# EAGLE board H Bridge and Accessories (EAGLE 6.2)
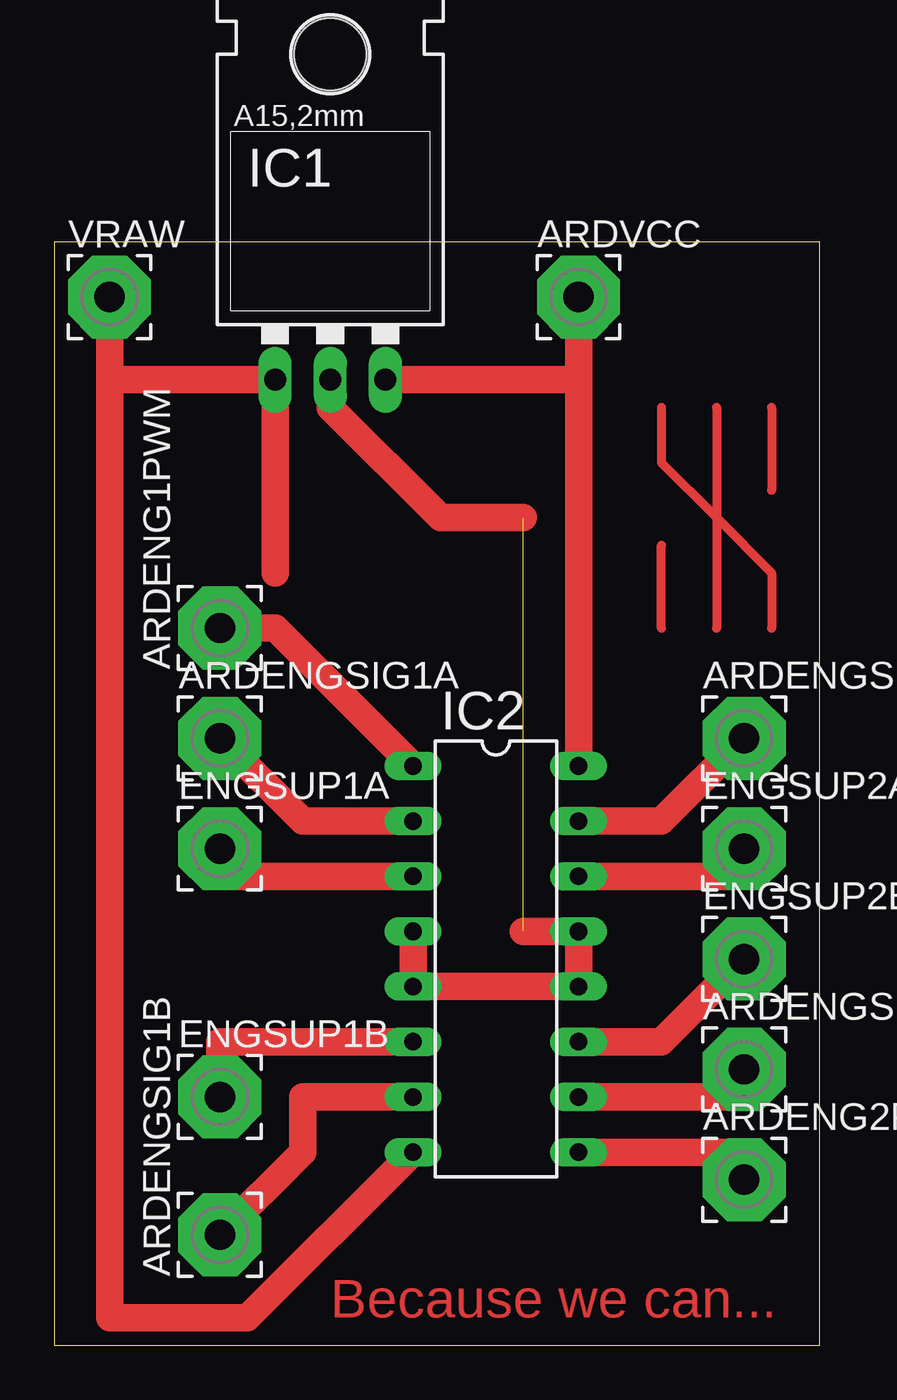
[diagram p0: board, top side]

Size 35.23 x 50.79 mm. Coordinates in mm from the lower left corner, seen from the top.
Outline: 0,0 35.23,0 35.23,50.79 0,50.79 0,0
Copper layers (1*16): Top 0.035mm / dielectric 1.5mm / Bottom 0.035mm
Design rules: minimum track width 50mil, minimum drill 24mil, track to track 8mil, track to pad 8mil, pad to pad 8mil, via to via 8mil, smd to smd 8mil, copper to edge 40mil, drill to drill 8mil, minimum pad ring 10mil, minimum via ring 8mil, stop-mask expansion 4mil, vias tented up to drill 0mil, thermal gap 10mil

## Footprints (pad centres in the part's own frame; a part is rotated, then mirrored left to right if it is on the bottom)
3,81/1,4 = drill 1.397 pad 3.81 octagon: 1 0,0
78XXL = drill 1.016 long: GND 0,-3.81; IN -2.54,-3.81; OUT 2.54,-3.81 | hole 3.302: 0,11.176
DIP16 = drill 0.813 long: 1 -10.16,-3.81; 2 -7.62,-3.81; 3 -5.08,-3.81; 4 -2.54,-3.81; 5 0,-3.81; 6 2.54,-3.81; 7 5.08,-3.81; 8 7.62,-3.81; 9 7.62,3.81; 10 5.08,3.81; 11 2.54,3.81; 12 0,3.81; 13 -2.54,3.81; 14 -5.08,3.81; 15 -7.62,3.81; 16 -10.16,3.81

## Placement (x,y rotation side)
ARDENG1PWM  Eng 1 Pwm  [3,81/1,4]  7.62,33.02 90 top
ARDENG2PWM  Eng2 Pwm  [3,81/1,4]  31.75,7.62 0 top
ARDENGSIG1A  Eng Sig 1A  [3,81/1,4]  7.62,27.94 0 top
ARDENGSIG1B  Eng Sig 1B  [3,81/1,4]  7.62,5.08 90 top
ARDENGSIG2A  Eng Sig 2A  [3,81/1,4]  31.75,27.94 0 top
ARDENGSIG2B  Eng Sig 2B  [3,81/1,4]  31.75,12.7 0 top
ARDVCC  Ard VCC  [3,81/1,4]  24.13,48.26 0 top
ENGSUP1A  Eng Sup 1A  [3,81/1,4]  7.62,22.86 0 top
ENGSUP1B  Eng Sup 1B  [3,81/1,4]  7.62,11.43 0 top
ENGSUP2A  Eng Sup 2A  [3,81/1,4]  31.75,22.86 0 top
ENGSUP2B  Eng Sup 2B  [3,81/1,4]  31.75,17.78 0 top
IC1  5v  [78XXL]  12.7,48.26 0 top
IC2  SN754410  [DIP16]  20.32,16.51 270 top
VRAW  VRaw  [3,81/1,4]  2.54,48.26 0 top

## Library data of the parts
ARDENG1PWM ARDENG2PWM ARDENGSIG1A ARDENGSIG1B ARDENGSIG2A ARDENGSIG2B ARDVCC ENGSUP1A ENGSUP1B ENGSUP2A ENGSUP2B VRAW = wirepad
IC1 = v-reg
IC2 = HBridge

## Nets
ARDENGSIG1A: ARDENGSIG1A.1 IC2.2
ARDENGSIG1B: ARDENGSIG1B.1 IC2.7
ARDENGSIG2B: ARDENGSIG2B.1 IC2.10
GND: IC1.GND IC2.4 IC2.5 IC2.12 IC2.13
N$1: ARDVCC.1 IC1.OUT IC2.16
N$3: ARDENG1PWM.1 IC2.1
N$4: ARDENG2PWM.1 IC2.9
N$6: ARDENGSIG2A.1 IC2.15
N$8: ENGSUP1A.1 IC2.3
N$9: ENGSUP1B.1 IC2.6
N$10: ENGSUP2B.1 IC2.11
N$11: ENGSUP2A.1 IC2.14
N$12: IC1.IN IC2.8 VRAW.1

## Tracks (layer width: path | path; a pad name or v marks a point on that pad's centre or on a via)
ARDENGSIG1A
  Top 1.27: IC2.2 11.43,24.13 ARDENGSIG1A.1
ARDENGSIG1B
  Top 1.27: IC2.7 11.43,11.43 11.43,8.89 ARDENGSIG1B.1
ARDENGSIG2B
  Top 1.27: IC2.10 31.75,11.43 ARDENGSIG2B.1
GND  (1 unrouted)
  Top 1.27: IC2.4 IC2.5 IC2.12 IC2.13 21.59,19.05 | IC1.GND 12.7,43.18 17.78,38.1 21.59,38.1
N$1
  Top 1.27: ARDVCC.1 24.13,44.45 | 24.13,44.45 IC2.16 | 24.13,44.45 IC1.OUT
N$2
  Top 0.406: 33.02,43.18 33.02,39.37
N$3
  Top 1.27: IC2.1 10.16,33.02 ARDENG1PWM.1
N$4
  Top 1.27: IC2.9 31.75,8.89 ARDENG2PWM.1
N$5
  Top 0.406: 27.94,43.18 27.94,40.64 30.48,38.1 | 30.48,43.18 30.48,38.1 | 30.48,38.1 30.48,33.02 | 30.48,38.1 33.02,35.56 33.02,33.02
N$6
  Top 1.27: IC2.15 27.94,24.13 ARDENGSIG2A.1
N$7
  Top 0.406: 27.94,33.02 27.94,36.83
N$8
  Top 1.27: IC2.3 7.62,21.59 ENGSUP1A.1
N$9
  Top 1.27: IC2.6 7.62,13.97 ENGSUP1B.1
N$10
  Top 1.27: IC2.11 27.94,13.97 ENGSUP2B.1
N$11
  Top 1.27: IC2.14 31.75,21.59 ENGSUP2A.1
N$12
  Top 1.27: IC2.8 8.89,1.27 2.54,1.27 2.54,44.45 | VRAW.1 2.54,44.45 | 2.54,44.45 IC1.IN 10.16,35.56

## Text on the board
Top: Because we can...